# Altium PCB Nucleo_Dory_QFN68.PcbDoc (part 2 of 3)
Units mm, origin at the board's own origin, x right, y up, seen from the top; angles counter-clockwise.
Board outline 70.13 x 64.58 mm, 4 copper layers (L1, L2, L3, L4), stack 1.565 mm thick; 212 components, 161 nets, 1280 pads, 261 vias.
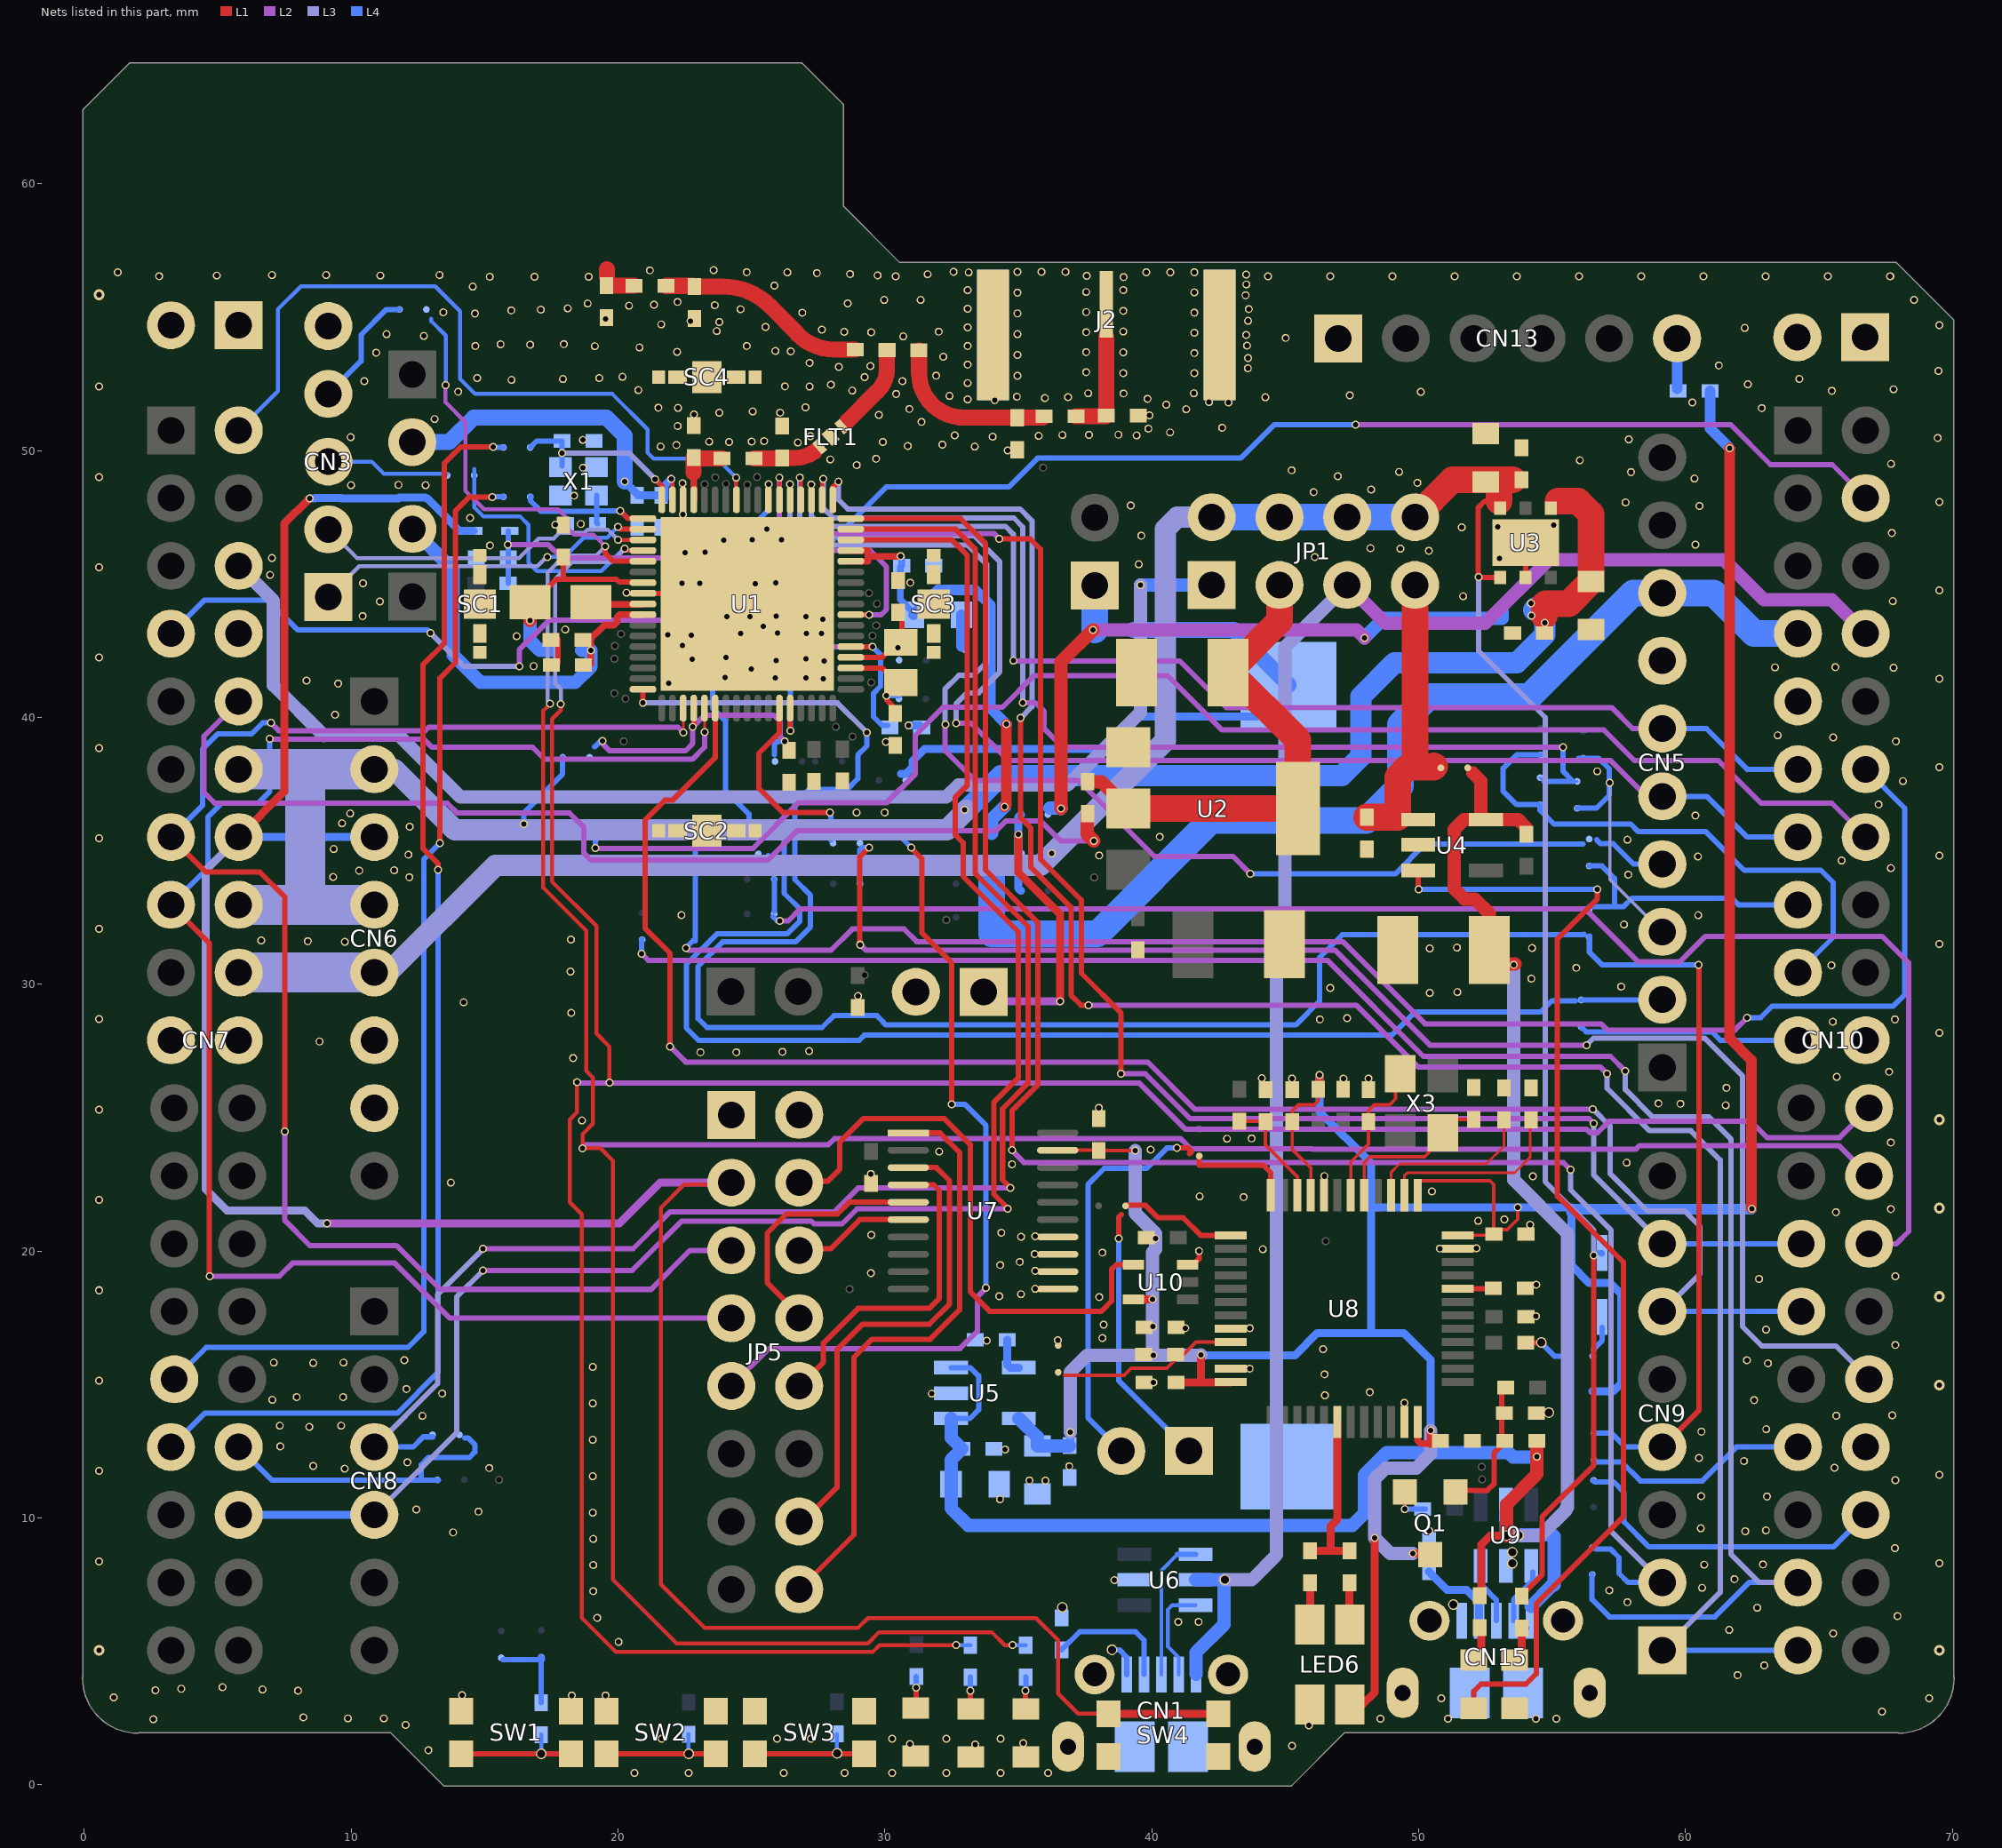
[diagram p4: the nets of this part, all layers, seen from the top]

## Via types
v1: diameter 0.3, hole 0.2, L1 to L4, tented both sides, 254 vias
v2: diameter 0.406, hole 0.203, L1 to L4, tented both sides, 7 vias

## Nets (pads, with @x,y where several pads share a name; then routed paths per layer and width w, separated by ;. In a path a pad name is that pad's centre, name@x,y a point inside that pad or via, vN(x,y) a via of type N, cw(c..) or ccw(c..) an arc to the next point about the centre after c; other vN are vias at no path point)
3V3: C13.1 C16.1 CN6.2 CN6.4 CN7.12 CN7.16 pad.105 pad.106 SB26.2 SB33.2 U3.4 | length 75.4
  L1 w1: 54.718,43.816 54.718,44.222 54.755,44.259 55.619,44.259 C13.1@56.46,45.1 56.46,47.616 55.967,48.109 55.224,48.109
  L3 w0.8: CN6.2@10.87,38.06 11.615,38.06 13.894,35.781 27.12,35.781 27.122,35.783 27.66,35.783 27.662,35.781 32.321,35.781 v1@33.055,36.515
  L3 w1.5: CN7.16@5.79,32.98 8.287,32.98 ; CN7.12@5.79,38.06 8.242,38.06 ; CN6.4@10.87,32.98 8.287,32.98 ; CN6.2@10.87,38.06 8.242,38.06 ; 8.242,38.06 8.287,38.015 8.287,32.98
  L4 w0.2: v1(16.475,36.002) 16.475,36.427 17.927,37.879 SB33.2@17.927,38.505
  L4 w0.8: v1@33.066,36.536 34.35,37.82 47.117,37.82 47.836,38.539 47.836,40.786 49.094,42.044 53.682,42.044 54.732,43.094 v1(54.732,43.547) 54.732,44.094 54.718,44.108 54.385,44.108 54.313,44.036
  other v1: 32.988,36.536
3V3_STLINK: C22.1 C27.1 C41.1 C43.1 C47.1 C48.1 C49.1 C50.1 LED6.4 pad.19 pad.37 pad.45 pad.47 pad.48 pad.59 Q1.3 R24.2 R30.1 R31.2 R32.2 SB37.1 U5.5 U7.19 U8.1 U8.9 U8.24 U8.36 U8.48 U10.5 | length 136.4
  L1 w0.127: U7.19@36.475,23.781 C41.1@37.996,23.781 ; C41.1@38.011,23.766 v1@39.375,23.766 ; 41.788,15.096 U8.24@42.96,15.096 ; U8.9@45.96,22.096 45.96,23.116 45.26,23.816 C47.1@45.26,24.857 45.26,25.256 45.49,25.486 46.09,25.486 46.24,25.636 R24.2@46.24,26.065 ; U8.1@49.96,22.096 49.96,22.636 52.67,22.636 52.81,22.496 52.81,20.647 C50.1@52.821,20.636 ; U8.48@51.46,20.596 52.781,20.596 C50.1@52.821,20.636 ; pad.59@53.716,21.644 53.716,21.197 53.32,20.801 52.986,20.801 C50.1@52.821,20.636
  L1 w0.25: U8.36@49.96,13.596 49.96,12.905 50.079,12.786 50.454,12.786
  L1 w0.3: U10.5@39.319,18.186 40.022,18.186 v1(40.028,18.192) ; C48.1@40.909,15.076 41.768,15.076 ; pad.37@41.842,16.111 41.842,15.15 41.788,15.096 41.768,15.076 ; U8.24@42.96,15.096 42.94,15.076 41.768,15.076 ; R24.2@46.24,26.065 46.279,26.104 v1(46.279,26.603) ; LED6.4@47.42,3.014 47.896,3.014 48.354,3.472 v1(48.354,9.252) ; v1(49.789,8.67) 50.391,8.67 Q1.3@50.432,8.629 ; pad.19@50.442,13.267 50.452,12.877 50.454,12.786 pad.19@50.454,13.279 pad.19@50.442,13.267
  L1 w0.4: v1(61.658,50.087) 61.658,27.969 62.465,27.162 v1@62.465,21.604
  L3 w0.3: v1@40.04,18.164 40.04,16.116 pad.48@40.056,16.1 ; pad.45@40.142,20.463 pad.45@40.142,20.469 ; pad.19@50.45,13.275 pad.19@50.45,13.294
  L3 w0.5: v1(36.942,13.207) 36.942,15.466 37.576,16.1 pad.48@40.056,16.1 41.831,16.1 pad.37@41.842,16.111 ; v1(39.375,23.764) 39.375,21.423 40.142,20.656 pad.45@40.142,20.469 ; pad.48@40.04,16.116 40.028,16.128 v1(40.028,18.192) 40.028,19.955 40.142,20.069 40.142,20.463 pad.45@40.139,20.466 ; v1(49.789,8.67) 48.936,8.67 v1(48.354,9.252) 48.354,11.455 48.773,11.874 49.92,11.874 50.45,12.404 50.45,13.275 pad.19@50.454,13.279
  L4 w0.3: C27.1@36.913,12.706 C27.1@36.92,12.713 36.942,12.735 v1(36.942,13.207) ; pad.37@41.83,16.094 45.36,16.094 46.2,16.934 48.22,16.934 ; v1(46.279,26.603) 46.281,26.601 46.281,25.233 48.22,23.294 48.22,21.624 ; pad.19@50.45,13.294 50.45,15.921 49.437,16.934 48.22,16.934 ; SB37.1@56.511,14.739 57.275,14.739 57.598,15.062 57.598,18.383 57.176,18.805 56.39,18.805 55.73,19.465 55.73,21.463 55.73,21.644 48.24,21.644 48.22,21.624 ; 48.22,16.934 48.22,21.624
  L4 w0.4: 55.73,21.463 55.837,21.57 v1@62.465,21.57 ; R31.2@60.925,52.233 60.925,50.82 v1(61.658,50.087)
  L4 w0.5: U5.5@35.02,13.731 35.71,13.041 C22.1@35.71,12.706 C27.1@36.913,12.706
  other v1: 62.477,21.592
5V: C14.1 C15.1 CN6.5 CN7.18 D2.1 JP1.2 JP1.4 JP1.6 JP1.8 pad.118 R10.1 SB28.2 U3.1 U3.6 | length 106.7
  L1 w0.2: v1@52.237,45.257 52.237,47.87 52.476,48.109 53.01,48.109 ; v1@52.286,45.249 U3.1@53.056,45.249 ; R10.1@53.97,7.073 53.97,7.212 54.623,7.865 54.623,10.039 56.561,11.977 v1(56.561,19.833)
  L1 w1: JP1.8@49.865,47.505 51.266,48.906 53.01,48.906 ; 53.01,48.109 53.01,48.906 ; 53.526,48.906 53.01,48.906
  L3 w0.2: v1(52.246,45.257) 52.246,42.498 54.744,40 54.744,22.6 56.561,20.783 v1(56.561,19.833)
  L3 w0.8: CN6.5@10.87,30.44 11.394,30.44 15.403,34.449 35.833,34.449 40.508,39.124 40.508,47.056 40.957,47.505 JP1.2@42.245,47.505
  L3 w1: 8.51,30.3 8.65,30.44
  L3 w1.5: CN7.18@5.79,30.44 8.65,30.44 CN6.5@10.87,30.44
  L4 w0.2: v1(56.561,19.833) 56.662,19.934 D2.1@56.87,19.934 56.87,19.894 D2.1@56.86,19.884
  L4 w1: JP1.2@42.245,47.505 JP1.4@44.785,47.505 JP1.6@47.325,47.505 JP1.8@49.865,47.505
5V_EXT: CN7.6 JP1.1 | length 48.3
  L3 w0.4: 8.98,39.314 11.799,39.314
  L3 w0.5: CN7.6@6.014,45.68 CN7.6@5.79,45.68 7.09,44.38 7.09,42.602 7.089,42.601 7.089,41.205 8.98,39.314 ; 11.799,39.314 14.093,37.02 32.306,37.02 32.748,37.462 36.844,37.462 39.575,40.193 v1(39.575,44.961) ; JP1.1@42.245,44.905 JP1.1@42.245,44.965
  L4 w0.5: v1(39.575,44.961) 42.241,44.961 JP1.1@42.245,44.965
5V_INT: C9.1 JP1.3 R33.2 U2.2 | length 18.6
  L1 w0.5: R33.2@37.593,37.594 38.115,37.594 U2.2@39.125,36.584
  L1 w1: U2.2@39.125,36.584 U2.2@45.475,36.584 45.475,39.153 C9.1@42.901,41.728 ; C9.1@42.857,41.684 C9.1@42.901,41.728 ; JP1.3@44.785,44.965 44.785,43.612 C9.1@42.901,41.728
5V_USB_MCU: CN1.1 CN10.8 JP1.5 pad.6 U6.5 | length 67
  L2 w0.5: JP1.5@47.325,44.965 48.76,43.53 52.49,43.53 54.874,45.914 61.432,45.914 62.932,44.414 65.476,44.414 CN10.8@66.75,43.14
  L3 w0.5: pad.6@42.738,7.684 43.747,7.684 44.68,8.617 44.68,30.984 44.99,31.294 44.99,42.63 JP1.5@47.325,44.965 ; CN10.8@66.75,43.074 CN10.8@66.75,43.14
  L4 w0.5: U6.5@41.641,7.684 42.705,7.684 42.705,6.009 41.659,4.963 CN1.1@41.659,4.135
5V_USB_STLINK: C11.1 C21.1 C25.1 CN15.1 pad.12 pad.13 pad.18 pad.64 pad.65 R11.1 R12.1 R16.2 SB25.2 U4.5 U5.1 U5.3 U9.5 | length 79.7
  L1 w0.3: R12.1@52.34,7.234 52.34,9.001 52.683,9.344 pad.12@53.3,9.344
  L1 w0.5: 52.035,37.914 52.335,37.614 52.335,36.358 U4.5@52.523,36.17 ; pad.12@53.3,9.344 53.3,10.513 54.433,11.646 R16.2@54.433,12.886 ; pad.65@53.604,30.754 53.175,30.754 C11.1@52.645,31.284 52.645,32.657 52.105,33.197 51.72,33.197 51.335,33.582 51.335,35.806 51.699,36.17 U4.5@52.523,36.17 ; R11.1@54.034,35.62 54.034,35.867 53.731,36.17 U4.5@52.523,36.17
  L3 w0.5: pad.12@53.3,9.344 54.57,9.344 55.53,10.304 55.53,10.362 55.57,10.402 55.57,20.666 53.56,22.676 pad.65@53.56,30.734
  L4 w0.2: U5.1@32.48,13.731 33.188,13.731 33.511,14.055 33.511,15.323 33.198,15.636 U5.3@32.48,15.636
  L4 w0.5: U5.1@32.48,13.731 32.48,13.005 C25.1@32.891,12.594 32.478,12.181 C21.1@32.478,11.274 32.478,10.364 33.118,9.724 39.252,9.724 ; 39.259,9.724 47.52,9.724 47.97,10.174 47.97,11.614 48.804,12.448 53.369,12.448 53.529,12.288 54.421,12.288 pad.18@54.429,12.296 ; pad.12@53.28,9.344 U9.5@53.28,10.234 ; pad.12@53.3,9.344 53.748,9.344 pad.13@53.751,9.347 ; pad.13@53.742,9.367 55.017,9.367 55.07,9.314 55.07,7.488 55.012,7.488 CN15.1@54.207,6.683
AIN_1: R26.1 R28.1 U8.10 | length 4.2
  L1 w0.127: R26.1@43.28,24.867 R28.1@44.25,24.867 ; R28.1@44.26,24.857 44.26,23.986 45.46,22.786 U8.10@45.46,22.096
ANT: C37.2 L3.2 | length 1.4
  L1 w0.6: 19.579,56.514 19.579,56.793 ; C37.2@19.646,56.307 19.646,56.177 L3.2@20.598,56.177
AT2: CN3.3 SB22.2 | length 4.6
  L4 w0.15: CN3.3@9.146,49.587 10.769,49.587 11.219,49.137 SB22.2@13.575,49.137
AT3: CN3.4 SB23.2 | length 4.6
  L4 w0.1: CN3.4@9.6,52.157 CN3.4@9.613,52.144
  L4 w0.2: CN3.4@9.146,52.127 10.372,53.353 10.372,54.334 11.325,55.287 SB23.2@11.813,55.287
AVDD: CN5.8 CN10.7 SB49.2 SB50.2 SB51.2 | length 40
  L3 w1: CN5.8@59.13,44.664 CN5.8@59.13,44.789
  L4 w1: 33.995,34.271 33.995,31.891 37.966,31.891 42.22,36.145 48.033,36.145 49.323,37.435 49.323,39.739 50.37,40.786 54.161,40.786 58.039,44.664 CN5.8@59.13,44.664 61.05,44.664 62.574,43.14 CN10.7@64.21,43.14
BOOT0: CN7.7 pad.99 R6.1 U1.5 | length 33.7
  L1 w0.2: U1.5@28.722,42.652 pad.99@29.533,42.652
  L2 w0.2: v1(16.303,41.911) 16.303,42.537 17.409,43.643 23.44,43.643 24.431,42.652 pad.99@29.533,42.652
  L3 w0.2: v1(12.979,43.159) 14.227,41.911 v1(16.303,41.911)
  L4 w0.2: CN7.7@3.25,43.14 4.499,44.389 6.894,44.389 8.01,43.273 12.865,43.273 v1(12.979,43.159) ; pad.99@29.533,42.652 29.833,42.352 29.833,41.164 29.565,40.896 29.565,40.035 29.905,39.695 R6.1@30.107,39.695
GND: C1.1 C2.1 C3.1 C4.2 C5.2 C6.2 C7.2 C8.2 C9.2 C10.2 C11.2 C12.2 C13.2 C14.2 C15.2 C16.2 C17.2 C18.2 C19.2 C20.2 C21.2 C22.2 C23.2 C24.2 C25.2 C26.2 C27.2 C28.2 C29.2 C31.2 C32.2 C33.1 C34.1 C36.2 C37.1 C39.1 C40.1 C41.2 C42.1 C43.2 C44.1 C45.1 C46.1 C47.2 C48.2 C49.2 C50.2 CN1.5 CN1.6 CN3.5 CN4.2 CN5.7 CN6.6 CN6.7 CN7.8 CN7.19 CN7.20 CN10.9 CN10.20 CN10.32 CN11.1 CN11.2 CN12.1 CN12.2 CN13.1 CN15.5 CN15.6 FLT1.2 J2.2 JP5.1 JP5.2 LED1.K LED2.K LED3.K LED5.K LED6.1 pad.7 pad.8 pad.9 pad.10 pad.11 pad.15 pad.21 pad.23 pad.24 pad.25 pad.26 pad.28 pad.29 pad.30 pad.31 pad.32 pad.33 pad.34 pad.35 pad.36 pad.38 pad.39 pad.40 pad.41 pad.42 pad.43 pad.46 pad.49 pad.50 pad.51 pad.52 pad.53 pad.54 pad.56 pad.57 pad.58 pad.60 pad.61 pad.62 pad.63 pad.66 pad.85 pad.92 pad.93 pad.111 pad.112 pad.113 pad.114 pad.115 pad.119 pad.120 pad.121 pad.125 pad.126 pad.139 pad.140 pad.141 pad.142 pad.143 pad.144 pad.145 pad.146 pad.147 pad.148 pad.149 pad.150 pad.151 pad.152 pad.153 pad.154 pad.155 pad.156 pad.157 pad.158 pad.159 pad.160 pad.161 pad.162 pad.163 pad.164 pad.165 pad.166 pad.168 pad.169 pad.170 pad.171 pad.172 pad.173 pad.174 pad.175 pad.176 pad.177 pad.178 pad.179 pad.180 pad.181 pad.182 pad.183 pad.184 pad.185 pad.186 pad.187 pad.188 pad.189 pad.190 pad.191 pad.192 pad.193 pad.194 pad.195 pad.196 pad.197 pad.198 pad.199 pad.200 pad.201 pad.202 pad.203 pad.204 pad.205 pad.206 pad.207 pad.208 pad.209 pad.210 pad.211 pad.212 pad.213 pad.214 pad.215 pad.216 pad.217 pad.218 pad.219 pad.220 pad.221 pad.222 pad.223 pad.224 pad.225 pad.226 pad.227 pad.228 pad.229 pad.230 pad.231 pad.232 pad.233 pad.234 pad.235 pad.236 pad.237 pad.238 pad.239 pad.241 pad.242 pad.243 pad.244 pad.245 pad.246 pad.247 pad.248 pad.249 pad.250 pad.251 pad.254 pad.255 pad.256 pad.257 pad.258 pad.259 pad.260 pad.261 pad.262 pad.263 pad.264 pad.265 pad.266 pad.267 pad.268 pad.269 pad.270 pad.271 pad.272 pad.273 pad.274 pad.275 pad.276 pad.277 pad.278 pad.279 pad.280 pad.281 pad.282 pad.283 pad.284 pad.285 pad.286 pad.287 pad.288 pad.289 pad.290 pad.291 pad.292 pad.293 pad.294 pad.295 pad.296 pad.297 pad.298 pad.299 pad.300 pad.301 pad.302 pad.303 pad.304 pad.305 pad.306 pad.307 pad.308 pad.309 pad.310 pad.311 pad.312 pad.313 pad.314 pad.315 pad.316 pad.318 pad.319 pad.320 pad.321 pad.322 pad.323 pad.325 pad.326 pad.327 pad.328 pad.329 pad.330 pad.332 pad.333 pad.334 pad.335 pad.336 pad.337 pad.338 pad.339 pad.340 pad.342 pad.343 pad.344 pad.345 pad.346 pad.347 pad.348 pad.349 pad.350 pad.351 pad.352 pad.353 pad.354 pad.355 pad.356 pad.357 pad.358 pad.359 pad.360 pad.361 pad.362 pad.363 pad.364 pad.365 pad.366 pad.367 pad.368 pad.369 pad.370 pad.371 pad.372 pad.373 pad.374 pad.375 pad.376 pad.377 pad.378 pad.379 pad.380 pad.381 pad.382 pad.383 pad.384 pad.385 pad.386 pad.387 pad.388 pad.389 pad.390 pad.391 pad.392 pad.393 pad.394 pad.395 pad.396 pad.397 pad.398 pad.399 pad.400 pad.401 pad.402 pad.403 pad.404 pad.405 pad.406 pad.407 pad.408 pad.409 pad.410 pad.411 pad.412 pad.413 pad.414 pad.415 pad.416 pad.417 pad.418 pad.419 pad.420 pad.421 pad.422 pad.423 pad.424 pad.425 pad.426 pad.427 pad.429 pad.430 pad.431 pad.432 pad.433 pad.434 pad.435 pad.436 pad.437 pad.438 pad.439 pad.440 pad.441 pad.442 pad.443 pad.444 pad.445 pad.446 pad.447 pad.448 pad.449 pad.450 pad.451 pad.452 pad.453 pad.454 pad.455 pad.456 pad.457 pad.458 pad.459 pad.460 pad.461 pad.462 pad.463 pad.464 pad.465 pad.466 pad.467 pad.468 pad.469 pad.470 pad.471 pad.472 pad.473 pad.474 pad.475 pad.476 pad.477 pad.478 pad.479 pad.480 pad.481 pad.482 pad.483 pad.484 pad.485 pad.486 pad.487 pad.488 pad.489 pad.490 pad.491 pad.492 pad.493 pad.494 pad.495 pad.496 pad.497 pad.498 pad.499 pad.500 pad.501 pad.502 pad.503 pad.504 pad.505 pad.506 pad.507 pad.508 pad.509 pad.510 pad.511 pad.512 pad.513 pad.514 pad.515 pad.516 pad.517 pad.518 pad.519 pad.520 pad.521 pad.522 pad.523 pad.524 pad.525 pad.526 pad.527 pad.528 pad.529 pad.530 pad.531 pad.532 pad.533 pad.534 pad.535 pad.536 pad.537 pad.538 pad.539 pad.540 pad.541 pad.542 pad.543 pad.544 pad.545 pad.546 pad.547 pad.548 pad.549 pad.550 pad.551 pad.552 pad.553 pad.554 pad.555 pad.556 pad.557 pad.558 pad.559 pad.560 pad.561 pad.562 pad.563 pad.564 pad.565 pad.566 pad.567 pad.568 pad.569 pad.570 pad.571 pad.572 pad.573 pad.574 pad.575 pad.576 pad.577 pad.578 pad.580 pad.581 R1.1 R6.2 R15.2 R18.2 R19.1 R20.1 R22.2 R23.1 R28.2 SB40.2 SC1.1 SC2.1 SC3.1 SC4.1 SK_BT1.2 SW1.1 SW2.1 SW3.1 SW4.2 U1.32 U1.42 U1.69 U2.1 U3.2 U3.7 U4.2 U5.2 U6.2 U7.11 U7.12 U7.13 U7.14 U8.8 U8.20 U8.23 U8.35 U8.47 U9.2 U10.3 X1.2 X1.4 | length 13.7
  L1 w0.2: C23.2@17.756,42.035 C24.2@17.756,42.951 ; U1.42@20.941,44.652 U1.69@24.444,44.652 ; U1.32@22.444,48.155 22.444,46.652 U1.69@24.444,44.652 ; U1.69@24.844,44.252 U1.69@24.444,44.652 ; U10.3@41.346,19.486 41.543,19.486 41.768,19.711 pad.46@41.768,20.006 ; U3.2@54.006,45.249 U3.7@54.006,46.549 ; R20.1@54.415,13.933 54.432,13.95 pad.15@54.877,13.95
  L4 w0.1: R6.2@31.304,39.705 R6.2@31.38,39.629
  L4 w0.203: pad.8@38.51,5.064 38.78,5.064 39.059,4.785 CN1.5@39.059,4.135
  L4 w0.3: pad.120@30.889,39.705 R6.2@31.304,39.705
  other v1: 20.62,0.452 22.652,0.452 26.208,0.452 28.494,0.452 30.272,0.452 32.304,0.452 34.336,0.452 36.114,0.452 45.258,1.468 33.39,1.504 30.93,1.524 35.18,1.564 21.636,1.722 25.954,1.722 27.224,1.722 30.272,1.722 32.304,1.722 34.336,1.722 45.89,2.224 48.56,2.484 51.1,2.484 54.402,2.484 55.164,2.484 67.356,2.738 50.846,3.246 69.134,3.246 1.11,3.284 69.51,8.301 0.554,8.373 69.51,11.616 0.554,11.76 65.578,11.882 0.554,15.147 0.554,18.533 0.554,21.92 0.554,25.307 69.51,28.188 0.554,28.693 69.51,31.503 0.554,32.08 69.51,34.817 0.554,35.467 69.51,38.132 0.554,38.853 69.51,41.446 0.554,42.24 69.51,44.761 0.554,45.627 69.51,48.075 0.554,49.013 46.973,49.04 0.554,52.4 69.51,54.704 68.56,55.644 44.362,56.534 46.693,56.534 49.023,56.534 51.354,56.534 53.685,56.534 56.016,56.534 58.347,56.534 60.678,56.534 63.008,56.534 65.339,56.534 67.67,56.534 1.25,56.684
  other v2: 0.554,5.04 69.51,5.04 69.51,14.983 69.51,18.298 69.51,21.612 69.51,24.927 0.554,55.84
LED_STLK: R25.2 R27.2 U8.30 | length 6.4
  L1 w0.3: R25.2@45.93,8.773 46.71,8.773 ; U8.30@46.96,13.596 46.96,9.952 46.71,9.702 46.71,8.773 ; R27.2@47.41,8.773 46.71,8.773
NetC1_2: C1.2 L5.1 U1.31 | length 2.4
  L1 w0.26: 22.838,49.173 U1.31@22.844,48.155
  L1 w0.32: C1.2@22.836,49.736 C1.2@22.844,49.728
  L1 w0.6: C1.2@22.836,49.736 22.838,49.173 ; 23.117,49.703 L5.1@23.896,49.703
NetC2_2: C2.2 FLT1.1 L5.2 | length 1.9
  L1 w0.6: L5.2@25.094,49.703 C2.2@26.038,49.703 ; 26.417,49.727 ccw(c26.579,51.089) 27.359,49.961
NetC3_2: C3.2 D1.A pad.102 R5.2 U1.8 | length 20
  L1 w0.2: U1.8@28.722,43.852 28.729,43.845 pad.102@29.411,43.845
  L2 w0.2: v1(15.88,46.479) 17.382,46.479 17.886,45.975 20.106,45.975 20.112,45.969 20.402,45.969 20.408,45.975 21.826,45.975 22.397,46.546 23.414,46.546 23.699,46.261 29.446,46.261 30.062,45.645 30.062,44.044 29.863,43.845 pad.102@29.411,43.845
  L4 w0.2: R5.2@15.881,45.028 D1.A@15.881,46.998
NetC4_1: C4.1 pad.69 SB44.1 U1.34 X1.3 | length 7
  L1 w0.2: pad.69@21.391,48.926 21.644,48.673 U1.34@21.644,48.155
  L3 w0.2: v1(17.905,49.911) 20.406,49.911 pad.69@21.391,48.926
  L4 w0.2: SB44.1@16.714,50.119 16.956,50.361 C4.1@17.9,50.361 v1@17.9,49.911 ; X1.3@17.9,49.422 v1@17.9,49.911 ; v1(17.905,49.911) v1@17.9,49.911
NetC5_1: C5.1 SB43.1 U1.35 X1.1 | length 5.7
  L1 w0.2: v1(20.09,47.739) 20.377,47.452 U1.35@20.941,47.452
  L4 w0.2: SB43.1@16.714,48.268 16.714,48.125 17.11,47.729 19.2,47.729 19.201,47.73 ; X1.1@19.201,48.323 19.201,47.73 ; C5.1@19.236,47.259 19.201,47.294 19.201,47.73 ; v1(20.09,47.739) 19.21,47.739 19.201,47.73
NetC6_1: C6.1 pad.110 SB45.1 U1.3 X2.1 | length 3.1
  L1 w0.2: U1.3@28.722,41.852 29.899,41.852 X2.1@30.444,41.307 ; pad.110@30.058,40.815 30.07,40.803 30.07,40.654 C6.1@30.393,40.331
  L4 w0.2: pad.110@30.058,40.815 30.529,40.815 30.545,40.831
NetC7_1: C7.1 pad.134 SB46.1 U1.4 X2.2 | length 3
  L1 w0.2: U1.4@28.722,42.252 29.899,42.252 30.454,42.807 X2.2@30.591,42.807 30.643,42.859 C7.1@30.643,43.695
NetC12_1: C12.1 JP1.7 SB25.1 U4.1 | length 11.8
  L1 w1: C12.1@48.057,36.263 49.215,36.263 49.215,37.76 49.595,38.14 50.569,38.14 ; JP1.7@49.865,44.965 49.865,38.14 50.569,38.14 ; 50.569,38.192 50.595,38.166 50.569,38.14
NetC23_1: C23.1 C24.1 JP6.2 pad.107 SB31.2 U1.44 | length 15.7
  L1 w0.25: C24.1@18.964,42.935 19.487,43.458 19.843,43.458 19.975,43.59 19.975,43.773 20.054,43.852 U1.44@20.941,43.852 ; C23.1@18.982,42.003 C24.1@18.982,42.917
  L4 w0.25: JP6.2@12.296,47.063 JP6.2@12.524,47.063 ; pad.107@18.975,42.506 pad.107@18.983,42.514
  L4 w0.5: JP6.2@12.296,47.063 13.829,45.53 13.829,42.337 14.844,41.322 18.409,41.322 18.983,41.896 pad.107@18.983,42.514 ; 18.637,42.506 pad.107@18.975,42.506
NetC26_1: C26.1 U5.4 | length 1.4
  L4 w0.3: C26.1@34.589,16.674 34.589,15.743 34.695,15.636 U5.4@35.02,15.636
NetC29_1: C29.1 L1.1 pad.108 SB31.1 U1.41 | length 7.9
  L1 w0.2: L1.1@16.702,44.318 16.827,44.318 17.693,45.184 17.951,45.184 ; C29.1@17.951,46.01 17.951,45.184 ; U1.41@20.941,45.052 20.941,45.07 20.049,45.07 19.935,45.184 17.951,45.184
  L1 w0.5: pad.108@16.702,43.63 L1.1@16.702,44.318
  L4 w0.5: pad.108@16.702,43.63 16.702,42.878 17.074,42.506 SB31.1@17.502,42.506
NetC31_1: C31.1 pad.136 SB33.1 SB34.1 U1.55 | length 10.6
  L1 w0.2: v1(22.805,39.645) 22.778,39.645 22.844,39.711 U1.55@22.844,40.349
  L2 w0.2: v1(19.411,39.111) 19.411,39.029 19.692,38.748 22.531,38.748 22.805,39.022 v1(22.805,39.645) 23.245,40.085 25.831,40.085 26.083,39.833 26.083,39.274 pad.136@26.249,39.108
  L4 w0.2: 19.122,38.894 19.339,39.111 v1(19.411,39.111) ; 25.863,38.605 25.863,38.991 25.98,39.108 pad.136@26.249,39.108
NetC32_1: C32.1 L2.2 pad.122 SB49.1 U1.13 U1.14 | length 17.8
  L1 w0.25: U1.13@28.722,45.852 29.365,45.852 29.365,46.252 U1.14@28.722,46.252 ; 29.491,46.042 30.588,46.042 pad.122@30.592,46.046
  L1 w0.4: v1(34.485,36.659) 34.551,36.725 v1(34.551,39.746)
  L4 w0.25: pad.122@30.592,46.046 30.631,46.007 C32.1@30.631,45.689 30.576,45.634 30.576,44.416 31.063,43.929 L2.2@31.063,43.852
  L4 w0.4: L2.2@31.063,43.852 31.985,44.774 33.387,44.774 33.943,44.218 33.943,40.354 v1(34.551,39.746) v1@34.559,39.738
  L4 w0.5: SB49.1@33.994,35.649 33.994,36.168 v1(34.485,36.659)
NetC33_2: C33.2 C34.2 JP4.2 pad.67 U1.33 | length 13.6
  L1 w0.1: pad.67@21.991,48.937 pad.67@22.044,48.884
  L1 w0.15: U1.33@22.044,48.155 pad.67@22.044,48.884
  L4 w0.3: v1(20.257,48.832) 20.753,48.336 20.753,48.327 C34.2@21.68,48.327 ; C34.2@21.752,48.215 21.752,48.698 pad.67@21.991,48.937
  L4 w0.6: JP4.2@12.289,50.316 13.672,50.316 14.598,51.242 19.574,51.242 20.257,50.559 v1(20.257,48.832)
NetC35_1: C35.1 C38.1 FLT1.3 | length 3
  L1 w0.6: 28.586,51.096 29.712,52.221 ; 29.721,52.221 ccw(c28.911,53.062) 30.077,53 C38.1@30.077,53.517
NetC35_2: C35.2 C36.1 L3.1 | length 7.9
  L1 w0.32: C36.1@22.798,56.173 C36.1@22.82,56.151 ; 26.728,54.383 26.728,54.387
  L1 w0.6: L3.1@21.8,56.173 C36.1@22.798,56.173 ; C36.1@22.82,56.151 23.912,56.151 cw(c23.912,53.611) 25.708,55.407 26.728,54.383 ; 26.728,54.358 ccw(c28.097,55.726) 28.097,53.791 C35.2@28.881,53.791
NetC38_2: C38.2 C39.2 L4.1 | length 6.5
  L1 w0.32: L4.1@35.919,51.237 L4.1@35.971,51.289
  L1 w0.6: C38.2@31.279,53.758 31.279,52.885 ccw(c32.952,52.909) 32.999,51.237 L4.1@35.919,51.237
NetC40_2: C40.2 J2.1 L4.2 | length 5.3
  L1 w0.32: C40.2@38.275,51.289 C40.2@38.296,51.31 ; J2.1@38.298,54.253 J2.1@38.298,55.481
  L1 w0.6: L4.2@37.169,51.289 C40.2@38.275,51.289 ; C40.2@38.296,51.31 38.296,54.251 J2.1@38.298,54.253
NetC44_2: C44.2 U8.6 X3.1 | length 5.6
  L1 w0.127: U8.6@47.46,22.096 47.46,23.346 48.12,24.006 C44.2@48.12,24.857 48.12,25.269 48.337,25.486 48.915,25.486 49.138,25.709 X3.1@49.138,26.65
NetC45_2: C45.2 U8.5 X3.3 | length 6
  L1 w0.127: U8.5@47.96,22.096 47.96,23.316 48.178,23.534 50.224,23.534 50.738,24.048 X3.3@50.738,24.45 ; X3.3@50.942,24.44 51.435,24.933 C45.2@52.064,24.933
NetCN1_2: CN1.2 U6.6 | length 3.7
  L4 w0.14: CN1.2@41.009,4.135 41.009,4.772 40.604,5.177 40.604,6.568 40.77,6.734 U6.6@41.641,6.734
NetCN1_3: CN1.3 U6.4 | length 5.4
  L4 w0.14: CN1.3@40.359,4.135 40.359,8.027 40.966,8.634
  L4 w0.2: 40.966,8.634 U6.4@41.641,8.634
NetCN1_4: CN1.4 R1.2 | length 4.8
  L4 w0.2: R1.2@36.627,5.061 37.299,5.733 39.394,5.733 39.709,5.418 CN1.4@39.709,4.135
NetCN3_1: CN3.1 pad.96 U1.36 | length 12.8
  L1 w0.2: pad.96@20.104,47.052 U1.36@20.941,47.052
  L3 w0.15: CN3.1@9.146,44.507 10.308,45.669 16.979,45.669 17.35,46.04 17.373,46.017 v1(17.349,46.017)
  L4 w0.15: v1(17.349,46.017) 17.996,46.017 18.712,46.733 19.588,46.733 pad.96@19.997,47.142
NetCN3_2: CN3.2 pad.95 U1.37 | length 12.9
  L1 w0.15: pad.95@20.006,46.652 U1.37@20.941,46.652
  L3 w0.15: CN3.2@9.146,47.047 10.219,45.974 11.828,45.974 11.84,45.962 12.752,45.962 12.764,45.974 16.301,45.974 17.026,46.699 17.588,46.699 17.814,46.925 18.743,46.925 18.858,47.04 19.618,47.04 pad.95@20.006,46.652
NetCN4_1: CN4.1 pad.117 SB24.1 SB27.1 SB28.1 | length 12.8
  L1 w0.3: pad.117@35.008,35.615 35.008,34.184 36.558,32.634 v1(36.558,29.366)
  L2 w0.3: CN4.1@33.71,29.707 34.051,29.366 v1(36.558,29.366)
  L4 w0.3: SB24.1@35.097,33.5 34.997,33.6 34.997,36.261 SB27.1@35.097,36.361
NetCN5_3: CN5.3 SB41.2 SB42.2 | length 10.1
  L3 w0.127: v1(57.165,37.557) 57.165,33.929 CN5.3@59.13,31.964
  L4 w0.127: 56.648,36.596 56.65,36.594 56.66,36.604
  L4 w0.2: SB41.2@55.94,36.596 56.648,36.596 ; 56,38.466 56.748,38.466 57.14,38.074 57.14,37.084 56.66,36.604
NetCN7_10: CN7.10 pad.585 R33.1 | length 41
  L1 w0.5: R33.1@37.593,36.396 37.583,36.386 37.583,35.62 pad.585@37.828,35.375
  L2 w0.2: CN7.10@5.79,40.6 4.487,39.297 4.487,37.191 4.891,36.787 13.609,36.787 13.977,36.419 18.188,36.419 18.722,35.885 18.722,34.911 18.98,34.653 25.619,34.653 26.723,35.757 34.172,35.757 34.54,36.125 35.827,36.125 36.504,35.448 36.522,35.448 36.595,35.375 pad.585@37.828,35.375
NetCN7_32: CN7.32 SB14.1 SB16.1 | length 11.6
  L4 w0.2: CN7.32@5.79,12.66 7.038,11.412 12.625,11.412 ; SB16.1@13.278,11.412 12.625,11.412 ; 14.257,13.006 14.384,13.006 14.638,12.752 14.638,12.471 14.439,12.272 12.897,12.272 12.625,12 12.625,11.412
NetCN10_12: CN10.12 pad.132 pad.133 SB2.2 | length 61.6
  L2 w0.2: v1(22.541,31.362) 22.626,31.277 27.986,31.277 28.778,32.069 30.721,32.069 31.193,31.597 47.159,31.597 50.24,28.516 56.839,28.516 57.068,28.287 61.848,28.287 pad.132@62.308,28.747
  L4 w0.2: v1(22.541,31.362) 22.814,31.635 22.902,31.635 SB2.2@22.902,35.586 ; pad.132@62.308,28.747 62.814,28.747 63.249,29.182 67.782,29.182 68.21,29.61 68.21,36.6 CN10.12@66.75,38.06
NetCN10_14: CN10.14 SB4.2 | length 54.6
  L2 w0.2: v1(19.158,35.099) 19.161,35.097 25.062,35.097 26.771,36.806 30.068,36.806 31.141,37.879 31.141,39.333 32.183,40.375 34.402,40.375 35.595,41.568 35.595,41.573 40.591,41.573 42.635,39.529 56.941,39.529 58.084,38.386 61.231,38.386 62.829,36.788 65.482,36.788 CN10.14@66.75,35.52
  L3 w0.2: v1@19.156,35.099 v1(19.158,35.099)
  L4 w0.2: v1(19.158,35.099) 19.158,35.396 19.366,35.604 SB4.2@19.726,35.604
NetCN10_15: CN10.15 SB1.1 SB3.1 | length 10.2
  L4 w0.2: SB1.1@56.39,34.434 56.869,34.434 57.334,33.969 57.334,32.904 ; SB3.1@56.4,32.904 57.334,32.904 ; CN10.15@64.21,32.98 61.984,32.98 61.74,33.224 57.99,33.224 57.67,32.904 57.334,32.904
NetCN10_17: CN10.17 SB5.1 SB6.1 | length 20.3
  L4 w0.2: SB6.1@54.57,38.594 53.67,38.594 53.17,38.094 53.17,37.234 53.67,36.734 SB5.1@54.55,36.734 54.55,36.524 55.07,36.004 57.945,36.004 58.235,35.714 60.759,35.714 62.199,34.274 65.07,34.274 65.53,33.814 65.53,31.76 CN10.17@64.21,30.44
NetCN10_19: CN10.19 SB8.1 | length 8.3
  L4 w0.2: SB8.1@56.09,28.404 56.28,28.214 60.99,28.214 61.304,27.9 CN10.19@64.21,27.9
NetCN10_26: CN10.26 SB7.2 SB9.2 SB10.2 | length 57.9
  L2 w0.2: v1(26.065,32.377) 26.379,32.377 26.821,32.819 56.253,32.819 58.232,30.84 59.784,30.84 60.745,31.801 67.363,31.801 68.36,30.804 68.36,20.738 67.902,20.28 CN10.26@66.877,20.28
  L4 w0.2: 25.573,34.302 25.626,34.355 25.626,34.821 ; SB7.2@25.811,32.528 25.962,32.377 v1(26.065,32.377) ; SB9.2@25.848,33.937 25.855,33.93 SB7.2@25.855,32.739
NetCN10_30: CN10.30 SB12.2 SB13.2 | length 55.7
  L1 w0.2: v1(29.081,31.485) 29.061,31.485 29.061,34.781 v1(29.404,35.124)
  L2 w0.2: v1(29.081,31.485) 29.283,31.283 46.855,31.283 50.419,27.719 v1(56.291,27.719)
  L3 w0.2: v1(56.291,27.719) 56.557,27.985 57.947,27.985 57.948,27.984 60.717,27.984 62.127,26.574 62.127,17.178 62.861,16.444 65.633,16.444 CN10.30@66.877,15.2
  L4 w0.2: SB12.2@29.052,33.784 29.052,35.035 29.141,35.124 v1(29.404,35.124)
NetCN10_31: CN10.31 SB11.1 | length 8.5
  L4 w0.2: SB11.1@56.571,12.169 56.641,12.099 57.599,12.099 58.31,11.388 60.634,11.388 61.906,12.66 CN10.31@64.21,12.66
NetCN10_34: CN10.34 SB17.2 | length 12.4
  L4 w0.2: SB17.2@56.54,11.406 56.595,11.351 57.312,11.351 57.698,10.965 57.698,9.852 58.635,8.915 65.545,8.915 CN10.34@66.75,10.12
NetCN10_35: CN10.35 SB15.1 SB18.1 | length 72.6
  L2 w0.2: v1(20.883,31.147) 21.132,30.898 46.579,30.898 50.179,27.298 57.192,27.298 v1(57.744,26.746)
  L3 w0.2: v1(57.744,26.746) 57.744,26.056 58.77,25.03 60.874,25.03 61.698,24.206 61.698,8.642 62.76,7.58 CN10.35@64.21,7.58
  L4 w0.2: v1(20.883,31.147) 20.883,31.649 SB18.1@20.905,31.671 ; SB15.1@56.498,7.881 56.498,6.942 57.144,6.296 61.096,6.296 62.38,7.58 CN10.35@64.21,7.58
NetCN13_6: CN13.6 R31.1 | length 1.9
  L4 w0.4: R31.1@59.68,52.325 CN13.6@59.68,54.204
NetCN14_1: CN14.1 SB39.2 U8.13 | length 14.4
  L1 w0.2: v1(38.769,20.473) 38.769,21.28 38.868,21.379 ; SB39.2@39.04,21.716 39.763,21.716 40.23,21.249 41.175,21.249 41.828,20.596 U8.13@42.96,20.596
  L4 w0.2: v1(38.769,20.473) 38.769,15.138 CN14.1@41.398,12.509
NetCN14_2: CN14.2 SB38.2 U8.12 | length 19.1
  L1 w0.2: v1(40.943,23.861) 41.364,23.861 41.496,23.729 41.416,23.649 ; 41.77,23.221 44.155,23.221 44.18,23.196 44.19,23.206 44.46,22.936 U8.12@44.46,22.096 ; 41.78,23.231 SB38.2@41.78,23.568
  L4 w0.2: CN14.2@38.858,12.509 37.61,13.757 37.61,22.492 38.214,23.096 39.803,23.096 40.568,23.861 v1(40.943,23.861)
NetCN15_2: CN15.2 U9.1 | length 2.1
  L4 w0.2: CN15.2@53.557,6.15 53.557,6.941 54.27,7.654 U9.1@54.27,7.974
NetCN15_3: CN15.3 U9.3 | length 2
  L4 w0.2: U9.3@52.37,7.974 52.37,7.474 52.907,6.937 CN15.3@52.907,6.15
NetCN15_4: CN15.4 R23.2 | length 3
  L4 w0.3: R23.2@50.39,7.985 51.071,7.304 51.8,7.304 52.257,6.847 CN15.4@52.257,6.15
NetD2_2: D2.2 SB36.1 | length 1
  L4 w0.2: 56.566,16.277 56.566,16.34 56.88,16.654 D2.2@56.88,17.144
NetJP2_1: JP2.1 SB26.1 SB27.2 SB29.2 | length 25.3
  L1 w0.5: v1(36.602,36.59) 36.602,42.086 v1(37.793,43.277)
  L2 w0.5: v1(37.793,43.277) 47.679,43.277 v1(47.968,42.988)
  L4 w0.5: 36.186,36.604 36.602,36.604 v1(36.602,36.59) ; v1(47.968,42.988) 48.695,43.715 53.131,43.715 SB26.1@53.131,43.954
  L4 w1: v1@37.867,43.277 JP2.1@37.867,44.946
NetJP5_4: JP5.4 U10.4 | length 21.6
  L1 w0.2: JP5.4@26.859,22.627 27.861,22.627 28.316,23.082 28.316,24.093 29.183,24.96 32.232,24.96 33.198,23.994 33.198,18.478 33.925,17.751 38.116,17.751 38.492,18.127 38.492,19.314 38.664,19.486 U10.4@39.319,19.486
NetJP5_6: JP5.6 U7.6 | length 4.5
  L1 w0.2: JP5.6@26.859,20.087 27.971,20.087 29.065,21.181 U7.6@30.875,21.181
NetJP5_8: JP5.8 U7.5 | length 9.4
  L1 w0.2: JP5.8@26.859,17.547 25.589,18.817 25.589,20.672 26.306,21.389 28.223,21.389 28.665,21.831 U7.5@30.875,21.831
NetJP5_10: JP5.10 U7.4 | length 12.2
  L1 w0.2: JP5.10@26.859,15.007 27.695,15.843 27.695,16.555 28.996,17.856 31.665,17.856 32.031,18.222 32.031,22.287 31.837,22.481 U7.4@30.875,22.481
NetJP5_14: JP5.14 U7.3 | length 18.5
  L1 w0.2: JP5.14@26.783,9.726 28.2,11.143 28.2,16.303 29.16,17.263 31.672,17.263 32.423,18.014 32.423,22.638 31.93,23.131 U7.3@30.875,23.131
NetJP5_16: JP5.16 U7.1 | length 22.3
  L1 w0.2: JP5.16@26.859,7.387 28.841,9.369 28.841,16.025 29.516,16.7 31.698,16.7 32.795,17.797 32.795,23.704 32.068,24.431 U7.1@30.875,24.431
NetL1_2: L1.2 U1.43 | length 1.9
  L1 w0.25: L1.2@19.09,44.349 19.194,44.245 20.941,44.245 U1.43@20.941,44.252
NetL2_1: L2.1 SB35.1 | length 1.2
  L4 w0.4: 32.867,42.666 L2.1@32.867,43.852
NetLED1_A: LED1.A R2.2 | length 1.2
  L1 w0.2: LED1.A@31.15,2.876 ccw(c31.1,2.926) 31.171,2.926 v1(31.171,3.645)
  L4 w0.2: v1(31.171,3.645) 31.171,4.06 R2.2@31.175,4.065
NetLED2_A: LED2.A R3.2 | length 1.2
  L1 w0.2: v1(33.198,3.52) 33.198,2.899 ccw(c33.273,2.899) LED2.A@33.22,2.846
  L4 w0.2: v1(33.198,3.52) 33.205,3.527 R3.2@33.205,4.035
NetLED3_A: LED3.A R4.2 | length 1.2
  L1 w0.2: v1(35.274,3.52) 35.274,2.852 LED3.A@35.28,2.846
  L4 w0.2: v1(35.274,3.52) v1(35.274,3.52) R4.2@35.275,4.035
NetLED4_A: LED4.A R12.2 | length 1.3
  L1 w0.3: LED4.A@52.069,4.672 52.34,4.943 R12.2@52.34,5.895
NetLED4_K: LED4.K U4.3 | length 43
  L1 w0.2: U4.3@49.983,34.265 49.983,33.573 v1(49.995,33.561) ; LED4.K@52.069,2.868 52.069,3.509 52.335,3.775 54.022,3.775 54.407,4.16 54.407,6.777 57.669,10.039 57.669,19.591 55.201,22.059 55.201,31.697 56.689,33.185 v1(56.689,33.561)
  L4 w0.2: v1(49.995,33.561) v1(56.689,33.561)
NetLED5_A: LED5.A R10.2 | length 1.4
  L1 w0.3: LED5.A@53.593,4.672 53.863,4.942 53.863,5.768 R10.2@53.97,5.875
NetLED6_2: LED6.2 R25.1 | length 1.6
  L1 w0.3: LED6.2@45.93,6.024 R25.1@45.93,7.575
NetLED6_3: LED6.3 R27.1 | length 1.6
  L1 w0.3: LED6.3@47.41,6.024 R27.1@47.41,7.575
NetQ1_1: Q1.1 R16.1 R17.1 R20.2 | length 5.2
  L1 w0.2: Q1.1@51.2,11.036 52.577,11.036 52.821,11.28 52.821,12.436 53.114,12.729 R17.1@53.114,14.67
NetQ1_2: pad.22 Q1.2 R21.2 | length 1.5
  L1 w0.127: pad.22@49.477,10.329 49.491,10.343 Q1.2@49.491,11.079
  L4 w0.2: pad.22@49.46,10.334 R21.2@50.241,10.334
NetR7_1: pad.2 R7.1 SW1.2 | length 4.8
  L1 w0.2: SW1.2@14.103,1.167 SW1.2@14.13,1.167 SW1.2@18.203,1.167
  L4 w0.15: pad.2@17.124,1.163 R7.1@17.124,1.879
NetR7_2: R7.2 SB47.1 SB48.1 | length 3.2
  L4 w0.2: SB47.1@15.694,4.693 17.174,4.693 SB48.1@17.174,4.735 ; R7.2@17.124,3.077 SB48.1@17.124,4.785
NetR8_1: pad.3 R8.1 SW2.2 | length 4.8
  L1 w0.2: SW2.2@19.564,1.167 SW2.2@23.664,1.167
  L4 w0.15: R8.1@22.646,1.897 22.646,1.172 pad.3@22.655,1.163
NetR9_1: pad.4 pad.5 R9.1 SW3.2 | length 4.8
  L1 w0.2: SW3.2@25.127,1.167 SW3.2@29.227,1.167
  L4 w0.15: R9.1@28.203,1.905 28.203,1.19 pad.4@28.212,1.181
NetR14_1: pad.14 R14.1 SB36.2 | length 1.7
  L1 w0.2: R14.1@54.009,16.566 54.588,16.566 pad.14@54.598,16.576
  L4 w0.2: pad.14@54.585,16.567 55.085,16.067 SB36.2@55.515,16.067
NetR18_1: R18.1 U8.2 | length 7.1
  L1 w0.1: U8.2@49.46,22.096 49.46,22.826 49.573,22.939 53.595,22.939 54.182,23.526 R18.1@54.182,24.857
NetR19_2: R19.2 U8.44 | length 1.3
  L1 w0.2: U8.44@51.46,18.596 R19.2@52.791,18.596
NetR22_1: R22.1 U8.3 | length 6.5
  L1 w0.1: U8.3@48.96,22.096 48.96,22.946 49.28,23.266 52.531,23.266 53.194,23.929 R22.1@53.194,24.923
NetR30_2: R30.2 SB40.1 U8.21 | length 6.9
  L1 w0.127: 36.72,15.346 38.967,15.346 39.231,15.609 40.564,15.609 40.889,15.935 R30.2@40.889,16.126 41.193,16.126 41.663,16.596 U8.21@42.96,16.596
NetSB29_1: SB29.1 SB30.1 SK_BT1.1 | length 21
  L4 w0.3: 30.607,37.889 30.792,37.889 31.045,38.142 31.045,38.376 31.481,38.812 38.088,38.812 39.31,40.034 SK_BT1.1@43.93,40.034
  L4 w0.6: 39.305,43.274 43.07,43.274 SK_BT1.1@45.12,41.224
NRST: CN6.3 CN7.14 D1.K JP5.3 SW4.1 | length 101.6
  L1 w0.15: JP5.3@24.247,22.567 24.174,22.494 22.478,22.494 21.608,21.624 21.608,7.516 23.236,5.888 29.002,5.888 29.362,6.248 35.663,6.248 36.486,5.425 36.486,3.422 37.243,2.665 SW4.1@38.386,2.665
  L1 w0.3: CN7.14@5.79,35.52 7.494,37.224 7.494,47.261 v1@8.405,48.171 ; SW4.1@38.386,2.665 SW4.1@42.486,2.665
  L2 w0.3: v1(9.103,21.033) 20.047,21.033 21.581,22.567 JP5.3@24.247,22.567
  L3 w0.3: CN7.14@5.79,35.52 4.555,34.285 4.555,22.316 5.352,21.519 8.268,21.519 8.754,21.033 v1(9.103,21.033)
  L4 w0.3: CN7.14@5.79,35.52 CN6.3@10.87,35.52 ; v1(8.44,48.203) 8.639,48.203 8.659,48.223 9.633,48.223 9.653,48.203 11.773,48.203 11.809,48.239 12.783,48.239 12.819,48.203 12.861,48.203 13.715,47.349 13.715,47.34 14.057,46.998 D1.K@14.595,46.998
OSC_IN: CN7.29 SB43.2 | length 43.3
  L1 w0.2: v1(13.33,35.292) 13.33,41.476 13.902,42.048 13.902,47.733 14.428,48.259 v1(15.291,48.259)
  L4 w0.2: CN7.29@3.377,15.2 4.573,16.396 12.134,16.396 12.718,16.98 12.718,34.68 v1(13.33,35.292) ; v1(15.291,48.259) 15.3,48.268 SB43.2@15.706,48.268
OSC_OUT: CN7.31 SB44.2 | length 48.3
  L1 w0.2: v1(13.255,34.293) 13.255,34.531 12.7,35.086 12.7,41.987 13.494,42.781 13.494,49.526 14.113,50.145 v1(15.316,50.145)
  L4 w0.2: CN7.31@3.25,12.66 4.516,13.926 11.731,13.926 13.255,15.45 v1(13.255,34.293) ; v1(15.316,50.145) 15.342,50.119 SB44.2@15.706,50.119
PA0: CN7.34 CN8.4 U1.15 | length 67.5
  L1 w0.2: U1.15@28.722,46.652 32.509,46.652 33.08,46.081 33.08,37.449 32.638,37.007 32.638,35.595 32.934,35.299 32.934,34.037 34.995,31.976 34.995,26.49 34.081,25.576 34.081,22.136 34.63,21.587 v1(34.597,21.587)
  L2 w0.2: v1(14.933,19.277) 20.535,19.277 22.385,21.127 27.243,21.127 27.348,21.022 28.397,21.022 28.962,21.587 v1(34.597,21.587)
  L3 w0.2: CN8.4@10.87,10.12 13.963,13.213 13.963,18.296 v1@14.939,19.271
  L4 w0.3: CN7.34@5.79,10.12 CN8.4@10.87,10.12
PA1: CN8.3 SB14.2 U1.16 | length 62.4
  L1 w0.2: U1.16@28.722,47.052 32.647,47.052 33.38,46.319 33.38,34.156 35.361,32.175 35.361,26.285 34.409,25.333 34.409,22.672 34.696,22.385 v1(34.696,22.368)
  L2 w0.2: v1(14.933,20.091) 20.568,20.091 21.944,21.467 28.094,21.467 28.995,22.368 v1(34.696,22.368)
  L3 w0.2: CN8.3@10.87,12.66 13.238,15.028 13.238,18.372 v1@14.945,20.079
  L4 w0.2: CN8.3@10.87,12.66 12.328,12.66 12.708,13.04 SB14.2@13.06,13.04
PA2: CN9.2 SB15.2 U1.17 | length 70.9
  L1 w0.2: U1.17@28.722,47.452 32.836,47.452 33.76,46.528 33.76,34.291 35.727,32.324 35.727,26.227 34.759,25.259 v1(34.759,23.781)
  L2 w0.2: v1(34.759,23.781) 35.198,23.342 35.198,23.315 55.426,23.315 v1(55.688,23.053)
  L3 w0.2: v1(55.688,23.053) 55.688,22.305 57.201,20.792 57.201,9.509 CN9.2@59.13,7.58
  L4 w0.2: 56.637,8.832 57.194,8.832 57.507,8.519 57.507,7.922 57.849,7.58 CN9.2@59.13,7.58
PA3: CN9.1 CN10.37 pad.83 U1.18 | length 79.3
  L1 w0.2: U1.18@28.044,48.155 28.044,48.617 pad.83@28.262,48.835 ; v1(35.083,39.98) 35.083,36.24 35.462,35.861 35.462,34.398 36.974,32.886 36.974,29.588 37.346,29.216 v1(37.638,29.216)
  L2 w0.2: v1(37.638,29.216) 47.665,29.216 49.99,26.891 56.814,26.891 v1(57.061,26.644)
  L3 w0.2: pad.83@28.262,48.835 28.262,48.159 28.607,47.814 35.067,47.814 35.514,47.367 35.514,40.406 v1@35.086,39.977 ; v1(57.061,26.644) 57.059,26.642 57.059,26.104 58.65,24.513 60.199,24.513 61.299,23.413 61.299,7.209 CN9.1@59.13,5.04
  L4 w0.2: CN9.1@59.13,5.04 CN10.37@64.21,5.04
PA4: pad.82 SB5.2 SB41.1 U1.19 | length 40.2
  L1 w0.15: U1.19@27.644,48.404 27.644,48.892 pad.82@27.689,48.937
  L2 w0.2: v1(35.164,40.551) 35.635,40.551 35.968,40.218 35.968,39.577 36.666,38.879 v1(55.405,38.879)
  L3 w0.2: pad.82@27.689,48.937 27.689,47.847 28.063,47.473 34.833,47.473 35.164,47.142 v1(35.164,40.551)
  L4 w0.1: SB5.2@54.55,37.742 54.688,37.604 ; 55.794,37.604 SB41.1@55.94,37.604
  L4 w0.2: 54.688,37.604 55.794,37.604 55.405,37.993 v1(55.405,38.879)
PA5: CN5.6 CN10.11 pad.81 pad.129 U1.20 | length 44.9
  L2 w0.2: pad.129@34.813,42.12 41.042,42.12 42.791,40.371 57.226,40.371 58.013,39.584 CN5.6@59.13,39.584
  L3 w0.2: pad.81@27.239,48.728 27.239,47.55 27.629,47.16 34.524,47.16 34.813,46.871 pad.129@34.813,42.126
  L4 w0.2: CN5.6@59.13,39.584 60.783,39.584 62.307,38.06 CN10.11@64.21,38.06
PA6: CN5.5 CN10.13 pad.80 U1.21 | length 50.9
  L1 w0.15: pad.80@26.816,48.99 26.844,48.962 U1.21@26.844,48.155
  L2 w0.2: v1(32.663,39.784) 33.228,39.784 34.623,38.389 57.185,38.389 58.53,37.044 CN5.5@59.13,37.044
  L3 w0.2: pad.80@26.816,48.99 26.816,47.281 27.288,46.809 33.336,46.809 34.305,45.84 34.305,41.71 33.514,40.919 33.077,40.919 32.663,40.505 v1(32.663,39.784)
  L4 w0.2: CN5.5@59.13,37.044 60.791,37.044 62.315,35.52 CN10.13@64.21,35.52
PA7: CN5.4 pad.79 SB1.2 U1.22 | length 46.8
  L2 w0.2: v1(32.263,39.736) 32.26,39.733 32.26,38.753 33.373,37.64 37.246,37.64 40.098,34.788 43.043,34.788 v1(43.697,34.134) v1@43.697,34.115
  L3 w0.2: pad.79@26.441,48.739 26.441,46.863 26.845,46.459 33.092,46.459 33.81,45.741 33.81,42.065 33.328,41.583 32.775,41.583 32.26,41.068 32.26,39.739 v1(32.263,39.736)
  L4 w0.2: v1(43.697,34.134) 43.699,34.136 49.124,34.136 50.247,35.259 56.158,35.259 ; 56.667,35.417 56.814,35.27 57.291,35.27 58.057,34.504 CN5.4@59.13,34.504
PA8: CN9.7 CN10.25 pad.77 U1.23 | length 62.9
  L1 w0.15: U1.23@26.05,48.161 pad.77@26.05,48.985
  L1 w0.2: v1(34.288,46.692) 35.445,46.692 35.829,46.308 35.829,34.69 37.363,33.156 37.363,30.413 38.853,28.923 v1(38.853,26.644)
  L2 w0.2: pad.77@26.05,48.985 26.05,47.292 26.457,46.885 34.095,46.885 v1(34.288,46.692) ; v1(38.853,26.644) 39.762,26.644 41.444,24.962 56.392,24.962 v1@56.563,24.791
  L3 w0.2: v1(56.563,24.792) 56.562,24.791 56.562,22.848 CN9.7@59.13,20.28
  L4 w0.2: CN9.7@59.13,20.28 CN10.25@64.337,20.28
PA9: CN5.2 pad.76 SB8.2 SB10.1 U1.24 | length 63.2
  L4 w0.2: 24.906,35.859 24.906,36.383 24.024,37.265 24.024,39.868 23.554,40.338 23.554,44.332 24.642,45.42 24.642,46.782 25.643,47.783 pad.76@25.643,48.739 ; 25.224,35.761 25.917,35.761 26.227,35.451 26.227,33.409 26.812,32.824 26.812,32.367 26.335,31.89 23.706,31.89 22.564,30.748 22.564,28.356 23.015,27.905 29.04,27.905 29.229,28.094 48.995,28.094 49.856,28.955 54.566,28.955 54.995,29.384 55.87,29.384 ; SB8.2@56.09,29.412 59.118,29.412 CN5.2@59.13,29.424
PA10: CN9.4 pad.91 SB3.2 SB11.2 U1.51 | length 88.2
  L1 w0.2: pad.91@20.937,40.547 20.941,40.551 U1.51@20.941,41.052 ; CN9.4@58.982,12.512 CN9.4@59.13,12.66 60.507,14.037 v1@60.507,30.724 ; v1(60.484,30.726) v1@60.505,30.726
  L3 w0.2: pad.91@20.937,40.547 28.219,40.547 v1(29.324,39.442)
  L4 w0.2: v1(29.324,39.442) 29.324,38.928 28.985,38.589 28.985,37.704 28.579,37.298 27.155,37.298 26.625,36.768 26.625,33.923 27.214,33.334 27.214,32.154 26.65,31.59 23.918,31.59 22.997,30.669 22.997,28.718 23.336,28.379 27.642,28.379 28.091,28.828 29.702,28.828 29.941,28.589 29.941,28.568 30.032,28.477 45.39,28.477 46.291,29.378 46.291,31.01 47.135,31.854 56.2,31.854 56.2,31.874 ; SB3.2@56.4,31.808 56.4,31.204 56.88,30.724 60.482,30.724 v1(60.484,30.726) ; SB11.2@56.571,13.177 57.232,13.177 57.749,12.66 CN9.4@59.13,12.66
PA13: CN7.13 JP5.5 U1.54 | length 59.1
  L1 w0.1: U1.54@22.444,40.349 22.444,39.439 v1(22.451,39.432)
  L1 w0.2: CN7.13@3.25,35.52 4.565,34.205 6.582,34.205 7.52,33.267 v1(7.52,24.485)
  L2 w0.2: v1(6.993,39.799) 7.288,39.504 9.794,39.504 9.798,39.5 12.777,39.5 12.912,39.635 22.248,39.635 v1(22.451,39.432) ; v1(7.52,24.485) 7.52,21.141 8.448,20.213 11.696,20.213 13.342,18.567 21.237,18.567 22.697,20.027 JP5.5@24.247,20.027
  L4 w0.2: CN7.13@3.25,35.52 4.428,36.698 4.428,38.81 4.996,39.378 6.267,39.378 6.688,39.799 v1(6.993,39.799)
PA14: CN7.15 JP5.7 U1.56 | length 62
  L1 w0.1: CN7.15@3.25,32.98 CN7.15@3.257,32.98 ; v1(23.244,39.444) U1.56@23.244,40.349
  L1 w0.2: CN7.15@3.25,32.98 4.69,31.54 4.69,19.07 v1(4.699,19.061)
  L2 w0.2: v1(4.699,19.061) 7.315,19.061 7.817,19.563 11.622,19.563 13.698,17.487 JP5.7@24.247,17.487 ; v1(6.955,39.208) 6.977,39.186 12.73,39.186 13.036,38.88 16.805,38.88 17.255,38.43 22.788,38.43 23.244,38.886 v1(23.244,39.444)
  L4 w0.2: CN7.15@3.25,32.98 4.628,34.358 4.628,36.264 5.159,36.795 6.527,36.795 6.955,37.223 v1(6.955,39.208)
PA15: CN9.6 CN10.27 U1.57 | length 65.7
  L1 w0.2: v1(21.954,27.669) 21.954,31.16 21.01,32.104 21.01,36.148 21.771,36.909 22.063,36.909 23.644,38.49 U1.57@23.644,40.349
  L2 w0.2: v1(21.954,27.669) 22.537,27.086 39.843,27.086 41.605,25.324 55.874,25.324 55.882,25.316 56.172,25.316 56.18,25.324 v1(56.528,25.323)
  L3 w0.2: v1(56.528,25.323) 57.167,24.684 57.167,22.911 58.573,21.505 59.956,21.505 60.539,20.922 60.539,19.149 CN9.6@59.13,17.74
  L4 w0.2: CN9.6@59.13,17.74 CN10.27@64.337,17.74
PB0: CN10.22 pad.128 R3.1 SB22.1 U1.38 | length 138
  L1 w0.15: v1(17.861,40.497) 17.861,40.279 17.526,39.944 17.526,33.843 19.188,32.181 19.188,28.152 19.678,27.662 v1(19.678,26.319) ; pad.128@18.464,26.334 18.464,25.202 18.192,24.93 18.192,21.829 18.641,21.38 18.641,6.257 19.921,4.977 29.54,4.977 29.796,5.233 32.675,5.233 v1(32.669,5.239) ; v1(20.257,46.319) 20.324,46.252 U1.38@20.941,46.252
  L2 w0.15: v1@19.678,26.313 38.998,26.313
  L2 w0.2: pad.128@18.464,26.334 18.464,26.294 39.536,26.294 41.254,24.576 56.284,24.576 56.418,24.442 56.708,24.442 57.132,24.866 62.446,24.866 63.052,24.26 65.777,24.26 CN10.22@66.877,25.36
  L3 w0.15: v1(17.861,40.497) 17.861,41.059 17.648,41.272 17.648,45.182 18.281,45.815 19.428,45.815 19.43,45.814 19.752,45.814 v1(20.257,46.319)
  L4 w0.15: 14.618,49.321 14.618,47.873 14.965,47.526 16.337,47.526 16.651,47.212 16.651,45.798 16.961,45.489 19.374,45.489 20.204,46.319 v1(20.257,46.319) ; v1(32.669,5.239) 33.199,5.239 R3.1@33.205,5.233
PB1: CN10.24 R4.1 SB23.1 U1.39 | length 123.2
  L1 w0.15: v1(17.461,40.51) 17.202,40.251 17.202,33.617 18.807,32.012 18.807,26.753 19.058,26.502 19.058,24.772 18.672,24.386 v1(18.672,23.859) 19.339,23.859 19.811,23.387 19.811,7.69 22.197,5.304 29.367,5.304 29.786,5.723 33.999,5.723 34.489,5.233 v1(34.782,5.233)
  L1 w0.2: v1(19.526,46.408) 19.526,46.158 19.832,45.852 U1.39@20.941,45.852
  L2 w0.15: v1(13.539,52.457) 13.539,51.806 14.286,51.059 14.286,48.492 14.977,47.801 17.759,47.801 18.151,47.408 18.151,47.055 18.349,46.857 19.077,46.857 v1(19.526,46.408)
  L2 w0.2: v1(18.672,23.859) 18.793,23.98 27.873,23.98 28.109,24.216 41.083,24.216 41.293,24.006 41.293,23.996 41.448,23.841 46.008,23.841 46.033,23.816 58.13,23.816 58.274,23.96 65.737,23.96 CN10.24@66.877,22.82
  L3 w0.15: v1(17.461,40.51) 17.36,40.611 17.36,45.427 17.998,46.065 19.183,46.065 v1(19.526,46.408)
  L4 w0.15: 13.007,54.94 13.007,54.847 13.549,54.305 v1@13.549,52.457 ; v1(34.782,5.233) R4.1@35.275,5.233
PB2: CN7.2 pad.73 U1.27 | length 28.5
  L1 w0.15: pad.73@24.428,48.985 24.428,48.171 U1.27@24.444,48.155
  L4 w0.15: CN7.2@5.79,50.76 7.26,52.229 7.26,55.297 8.122,56.16 13.148,56.16 14.08,55.228 14.08,52.685 14.645,52.12 19.787,52.12 21.108,50.799 21.108,49.924 21.343,49.689 23.724,49.689 pad.73@24.428,48.985
PB3: JP5.9 SB13.1 U1.63 | length 40.6
  L1 w0.2: U1.63@26.044,40.349 26.044,39.42 25.278,38.654 25.278,37.342 26.187,36.433 v1(27.939,36.434) ; v1(30.989,35.124) 30.989,35.104 31.385,34.708 31.385,31.93 32.5,30.815 v1(32.5,25.508)
  L2 w0.2: JP5.9@24.247,14.947 25.647,16.347 32.816,16.347 33.464,16.995 33.464,18.283 33.798,18.617 v1(33.79,18.625)
  L4 w0.2: v1(27.939,36.434) 27.939,36.421 27.97,36.39 27.97,36.043 ; 27.97,35.398 27.97,36.043 ; v1(30.989,35.124) 30.07,36.043 27.97,36.043 ; v1(32.5,25.508) 32.989,25.508 33.79,24.707 v1(33.79,18.625)
PB4: CN10.4 U1.64 | length 50.3
  L1 w0.2: U1.64@26.444,40.349 26.444,39.509 v1(26.453,39.5)
  L2 w0.2: v1(47.628,50.968) 61.679,50.968 61.684,50.973 63.184,49.473 65.497,49.473 CN10.4@66.75,48.22
  L4 w0.2: v1(26.453,39.5) 26.453,45.039 30.05,48.636 34.637,48.636 35.719,49.718 43.338,49.718 44.593,50.973 44.598,50.968 v1(47.628,50.968)